# Altium PCB accel.PcbDoc
Units mm, origin at the board's own origin, x right, y up, seen from the top; angles counter-clockwise.
Board outline 21.46 x 11.68 mm, 2 copper layers (Top Layer, Bottom Layer); 5 components, 76 nets, 30 pads, 2 vias.
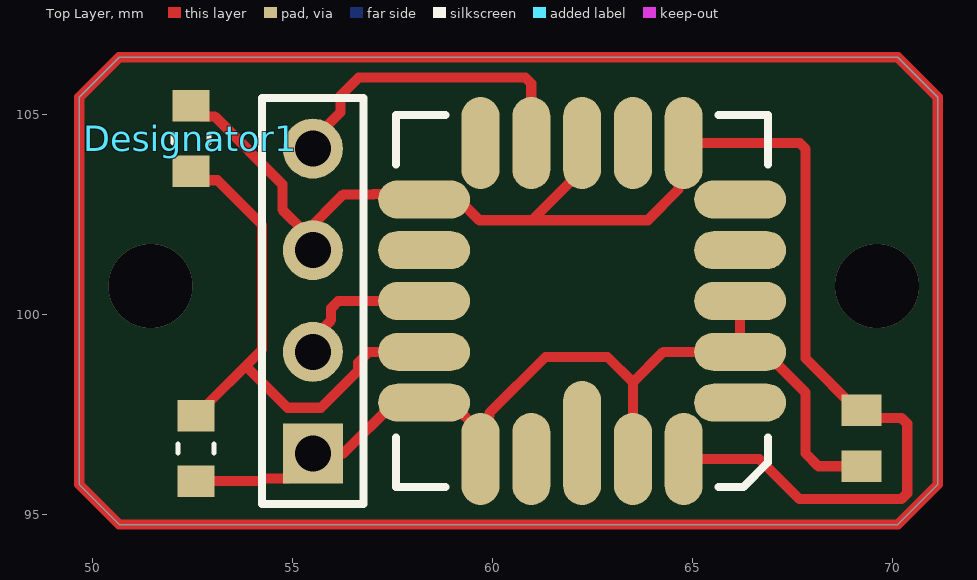
[diagram p0: Top Layer view]
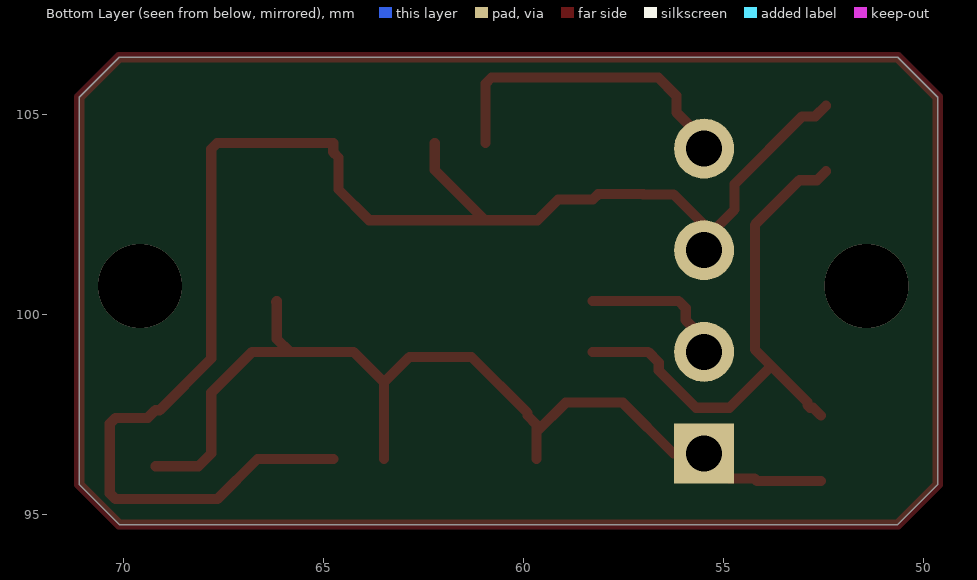
[diagram p1: Bottom Layer view, seen from below]
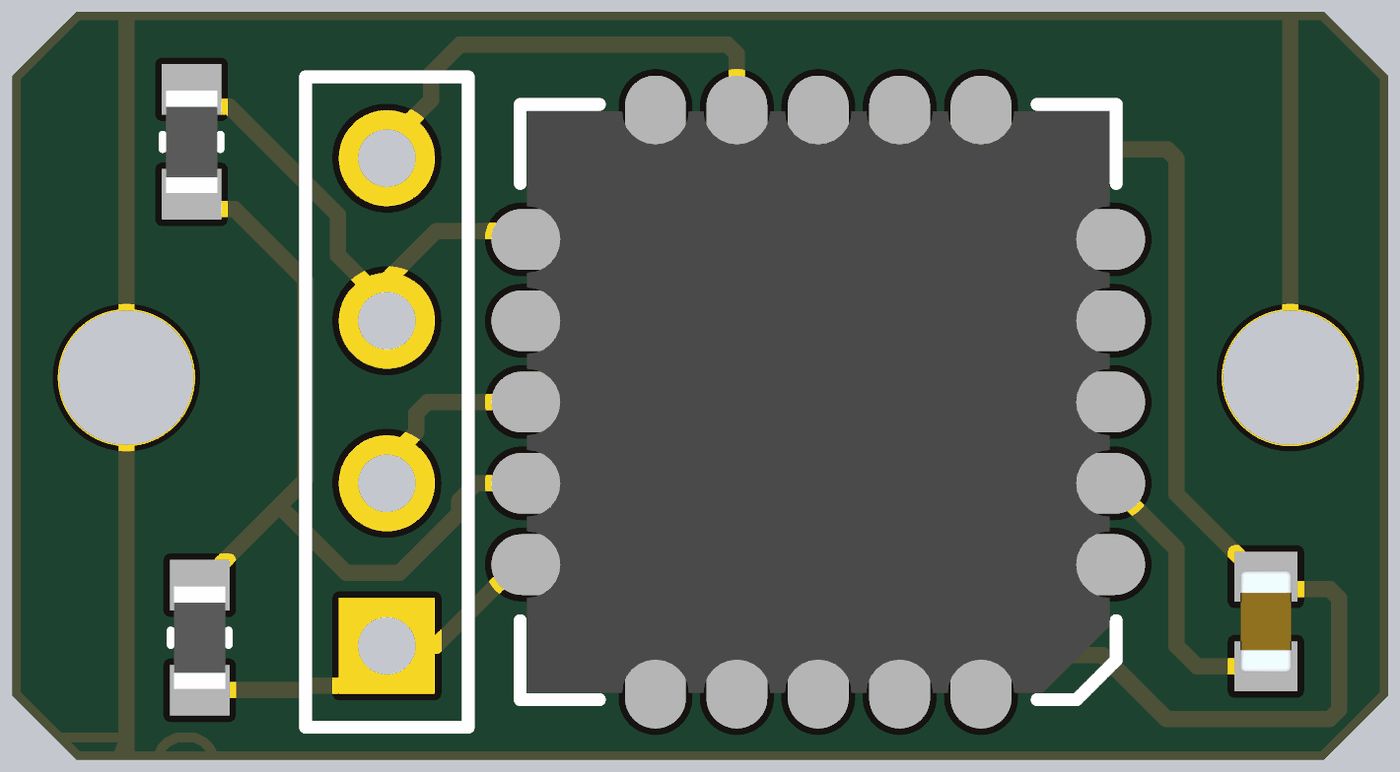
[diagram p2: 3D render of the assembled board from above, using the file's embedded part models]

## Layer stack, top to bottom
Top Solder: solder mask 0.0102, Solder Resist, Dk 3.5
Top Layer: signal copper 0.0356
Dielectric 1: dielectric 0.32, FR-4, Dk 4.8
Bottom Layer: signal copper 0.0356
Bottom Solder: solder mask 0.0102, Solder Resist, Dk 3.5

## Board outline
49.657,95.742 49.657,105.426 50.657,106.426 70.12,106.426 71.12,105.426 71.12,95.742 70.12,94.742 50.657,94.742

## Design rules (kind name [scope] priority, off if disabled: settings)
Clearance [All] p1: gap=0.254 ignorepadtopadclearanceinfootprint=TRUE except(0: Arc-Hole Track-Hole SMDPad-Hole THPad-Hole Via-Hole Fill-Hole Poly-Hole Region-Hole Text-Hole)
MinimumSolderMaskSliver [All] p1: minsoldermaskwidth=0.1
PolygonConnect [All] p1: connectstyle=Relief reliefconductorwidth=0.254 reliefentries=4 polygonreliefangle="90 Angle" airgapwidth=0.254
RoutingVias [All] p1: holewidth=0.711 width=1.27 viastyle="Through Hole" minholewidth=0.711 minwidth=1.27 maxholewidth=0.711 maxwidth=1.27
SilkToSolderMaskClearance [IsPad] p1: minsilkscreentomaskgap=0.2 clearancetoexposedcopper=TRUE
SolderMaskExpansion [All] p1: expansion=0.102 istentingtop=FALSE
Width [All] p1: maxlimit=0.254 minlimit=0.254 preferedwidth=0.254
28 further rules are at their usual default settings.

## Components (designator, comment, footprint, x,y, rotation, side; value= is the part's Value field where it differs from the comment)
*1 "SI1521L" LCC127P889X889X254-20N 62.23,100.33 r180 top
C12 "0.1uF" CAPC1608X90N 69.215,96.901 r90 top
Designator1 "2k" RESC1608X55N 52.451,104.394 r90 top (schematic designator R24)
P20 "Header 4" HDR1X4 55.499,96.52 r90 top
R23 "2k" RESC1608X55N 52.578,96.647 r270 top

## Footprints (in the part's own frame and the unit in brackets; to place one, negate y for a bottom-side part, rotate by r counter-clockwise, add the part's x,y. Pads: shape width x height; smd on the part's side, far side on the other; paste and mask are expansions set on the pad)
CAPC1608X90N [mm]
  rect 0.78x0.99 smd: 1(-0.7,0) 2(0.7,0)
  body extent -0.8,-0.41 0.8,0.41, height 0.9
HDR1X4 [mm] "Connector; Header; 4 Position"
  rect 1.5x1.5 hole 0.9: 1(0,0)
  round 1.5 hole 0.9: 2(2.54,0) 3(5.08,0) 4(7.62,0)
  silkscreen extent -1.27,-1.27 8.89,1.27
LCC127P889X889X254-20N [mm] "LCC, 20-Pins, Body 8.89x8.89mmx2.54mm, Pitch 1.27mm, IPC Medium Density"
  oval 0.95x3.1 smd: 1(0,3.55)
  oval 0.95x2.3 smd: 2(-1.27,3.95) 3(-2.54,3.95) 9(-2.54,-3.95) 10(-1.27,-3.95) 11(0,-3.95) 12(1.27,-3.95) 13(2.54,-3.95) 19(2.54,3.95) 20(1.27,3.95)
  oval 2.3x0.95 smd: 4(-3.95,2.54) 5(-3.95,1.27) 6(-3.95,0) 7(-3.95,-1.27) 8(-3.95,-2.54) 14(3.95,-2.54) 15(3.95,-1.27) 16(3.95,0) 17(3.95,1.27) 18(3.95,2.54)
  silkscreen extent -4.65,-4.65 4.65,4.65, body extent -4.54,-4.54 4.54,4.54, height 2.54
RESC1608X55N [mm]
  rect 0.79x0.93 smd: 1(-0.82,0) 2(0.82,0)
  silkscreen extent -0.11,-0.45 0.11,0.45, body extent -0.8,-0.4 0.8,0.4, height 0.55

## Part data
*1: library part CMP-010-00024-2, "Silicon Design SI-1521L-002 +- 2g LCC-20 Surface mount accelerometer"
C12: library part CMP-003-000001-1, "Cap Ceramic 0.1uF 25V X5R 10% SMD 0603 85ÂÂŽ T/R", Package=None, Availability=Unavailable, Component Type=Standard, Design Item ID=06033D104KAT2A, MF="{'manufacturer': u'AVX'}", MP=06033D104KAT2A, Pin Count=2, Price=None, Source=workerBoard.SCHLIB
Designator1 R23: library part RT0603BRD0733RL, "RES SMD 33 OHM 0.1% 1/10W 0603", Package=None, Availability=Unavailable, MF="{'manufacturer': u'Yageo'}", MP=RT0603BRD0733RL, Price=None
P20: "Header, 4-Pin", LatestRevisionDate=17-Jul-2002, LatestRevisionNote="Re-released for DXP Platform.", Publisher="Altium Limited"

## Via types
v1: diameter 2.1, hole 2.1, Top Layer to Bottom Layer, 2 vias

## Nets (pads, with @x,y where several pads share a name; then routed paths per layer and width w, separated by ;. In a path a pad name is that pad's centre, name@x,y a point inside that pad or via, vN(x,y) a via of type N, cw(c..) or ccw(c..) an arc to the next point about the centre after c; other vN are vias at no path point)
5V: 
"5V ref": *1.3 *1.9 *1.11 *1.14 C12.2 Designator1.2 P20.3 | length 38.4
  Top Layer w0.254: Designator1.2 52.719,104.946 53.042,104.946 54.737,103.251 54.737,102.616 P20.3@55.308,102.044 ; P20.3 55.499,101.854 P20.3@55.308,102.044 ; 57.019,102.997 56.261,102.997 P20.3@55.308,102.044 ; 57.019,103.003 58.147,103.003 *1.14 59.143,102.87 59.662,102.351 60.976,102.351 ; *1.11 62.23,103.605 60.976,102.351 ; *1.3 66.662,96.38 67.665,95.377 70.209,95.377 70.358,95.526 70.358,97.26 70.209,97.409 69.407,97.409 C12.2 69.11,97.601 67.818,98.893 67.818,104.131 67.669,104.28 *1.9 64.77,104.054 64.637,103.92 64.637,103.118 63.87,102.351 60.976,102.351
12V: 
A: 
AIN0+: 
AIN0-: 
AIN1+: 
AIN1-: 
AIN2+: 
AIN2-: 
AIN3+: 
AIN3-: 
AON: *1.16 P20.2 | length 3.7
  Top Layer w0.254: P20.2 55.499,99.397 55.954,99.853 55.954,100.15 56.134,100.33 *1.16
AOP: *1.12 P20.4 | length 8.1
  Top Layer w0.254: P20.4 55.499,104.358 56.19,105.049 56.19,105.466 56.642,105.918 60.811,105.918 60.96,105.769 *1.12
B: 
CS: 
DCLK: 
DOUT0: 
DOUT1: 
DOUT2: 
DOUT3: 
DRDY: 
GND: *1.2 *1.5 *1.6 *1.18 *1.19 C12.1 P20.1 R23.2 | length 25.4
  Top Layer w0.254: R23.2 54.171,95.827 54.241,95.897 54.876,95.897 P20.1 56.261,96.52 57.531,97.79 58.955,97.79 *1.19@59.69,97.055 ; *1.19 *1.19@59.69,97.055 ; *1.2 63.5,98.298 ; *1.6@66.204,100.306 *1.6 66.18,99.382 *1.5@65.858,99.06 ; C12.1 68.137,96.201 67.818,96.52 67.818,98.038 66.796,99.06 *1.5 *1.5@65.858,99.06 ; *1.19@59.69,97.055 59.69,97.243 59.914,97.468 59.914,97.533 61.314,98.933 62.865,98.933 63.5,98.298 ; 63.5,98.298 64.262,99.06 *1.5@65.858,99.06
IN0+: 
IN0-: 
IN1+: 
IN1-: 
IN2+: 
IN2-: 
IN3+: 
IN3-: 
MODE: 
Net1_1: 
Net2_1: 
Net2_2: 
Net*1_17: *1.17 Designator1.1 R23.1 | length 13.4
  Top Layer w0.254: Designator1.1 52.677,103.348 53.116,103.348 54.229,102.235 54.229,99.118 53.819,98.708 ; R23.1 52.774,97.663 52.844,97.663 52.916,97.735 52.916,97.805 53.819,98.708 ; *1.17 56.896,99.06 56.63,98.794 56.63,98.592 55.701,97.663 54.864,97.663 53.819,98.708
Net_1: 
NetC12_2: 
NetC13_2: 
NetC16_2: 
NetC17_2: 
NetC31_2: 
NetC32_2: 
NetC33_2: 
NetC34_2: 
NetC37_2: 
NetC38_2: 
NetC39_2: 
NetC40_2: 
NetP11_1: 
NetP11_2: 
NetP11_3: 
NetP11_4: 
NetR2_1: 
NetR3_1: 
NetR5_1: 
NetR6_1: 
NetR9_1: 
NetR10_1: 
NetR14_1: 
NetR15_1: 
NetR17_1: 
NetR18_1: 
NetR22_2: 
NetSW1_4: 
NetU1_32: 
RS485RX: 
RS485TX: 
SCLK: 
SDI: 
SDO: 
START: 
SYNC: 
V3ref: 
V4ref: 
VCM: 
pads on no net: *1.1 *1.4 *1.7 *1.8 *1.10 *1.13 *1.15 *1.20
copper on no net: | length 64
  Top Layer w0.254: 49.657,95.742 50.657,94.742 70.12,94.742 71.12,95.742 71.12,105.426 70.12,106.426 50.657,106.426 49.657,105.426 49.657,95.742
  other v1: 51.435,100.711 69.596,100.711

## Dimensions
49.657,105.426 to 51.435,100.711 on Top Layer
49.657,95.742 to 71.12,95.742 on Top Layer
51.435,100.711 to 69.596,100.711 on Top Layer